# Altium PCB BopIt_PCB.PcbDoc
Units mil, origin at the board's own origin, x right, y up, seen from the top; angles counter-clockwise.
Board outline 3770 x 3775 mil, 2 copper layers (Top Layer, Bottom Layer); 24 components, 16 nets, 77 pads, 0 vias.
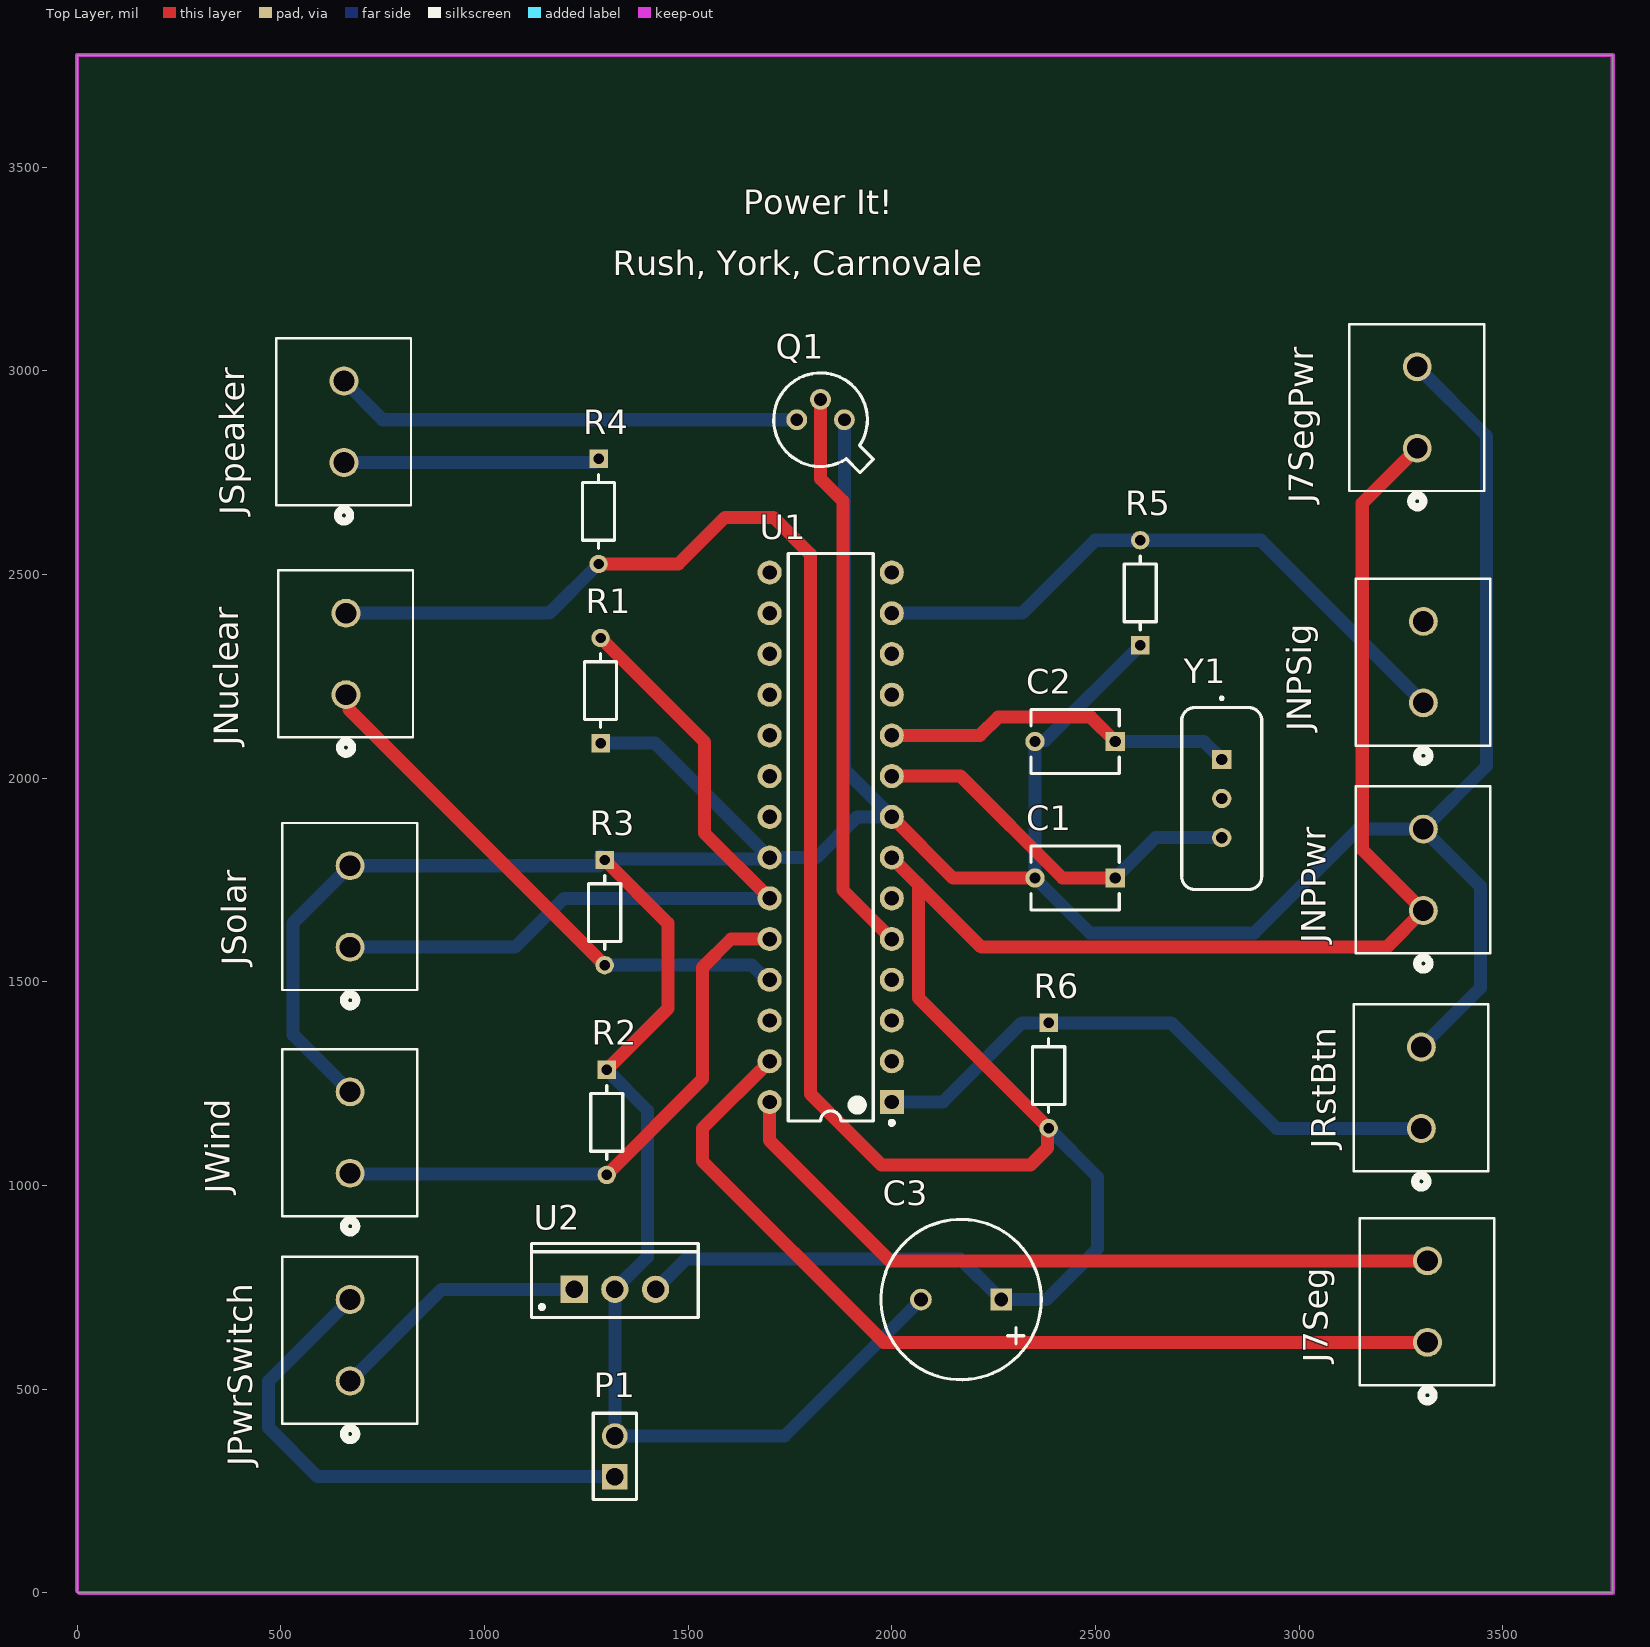
[diagram p0: Top Layer view]
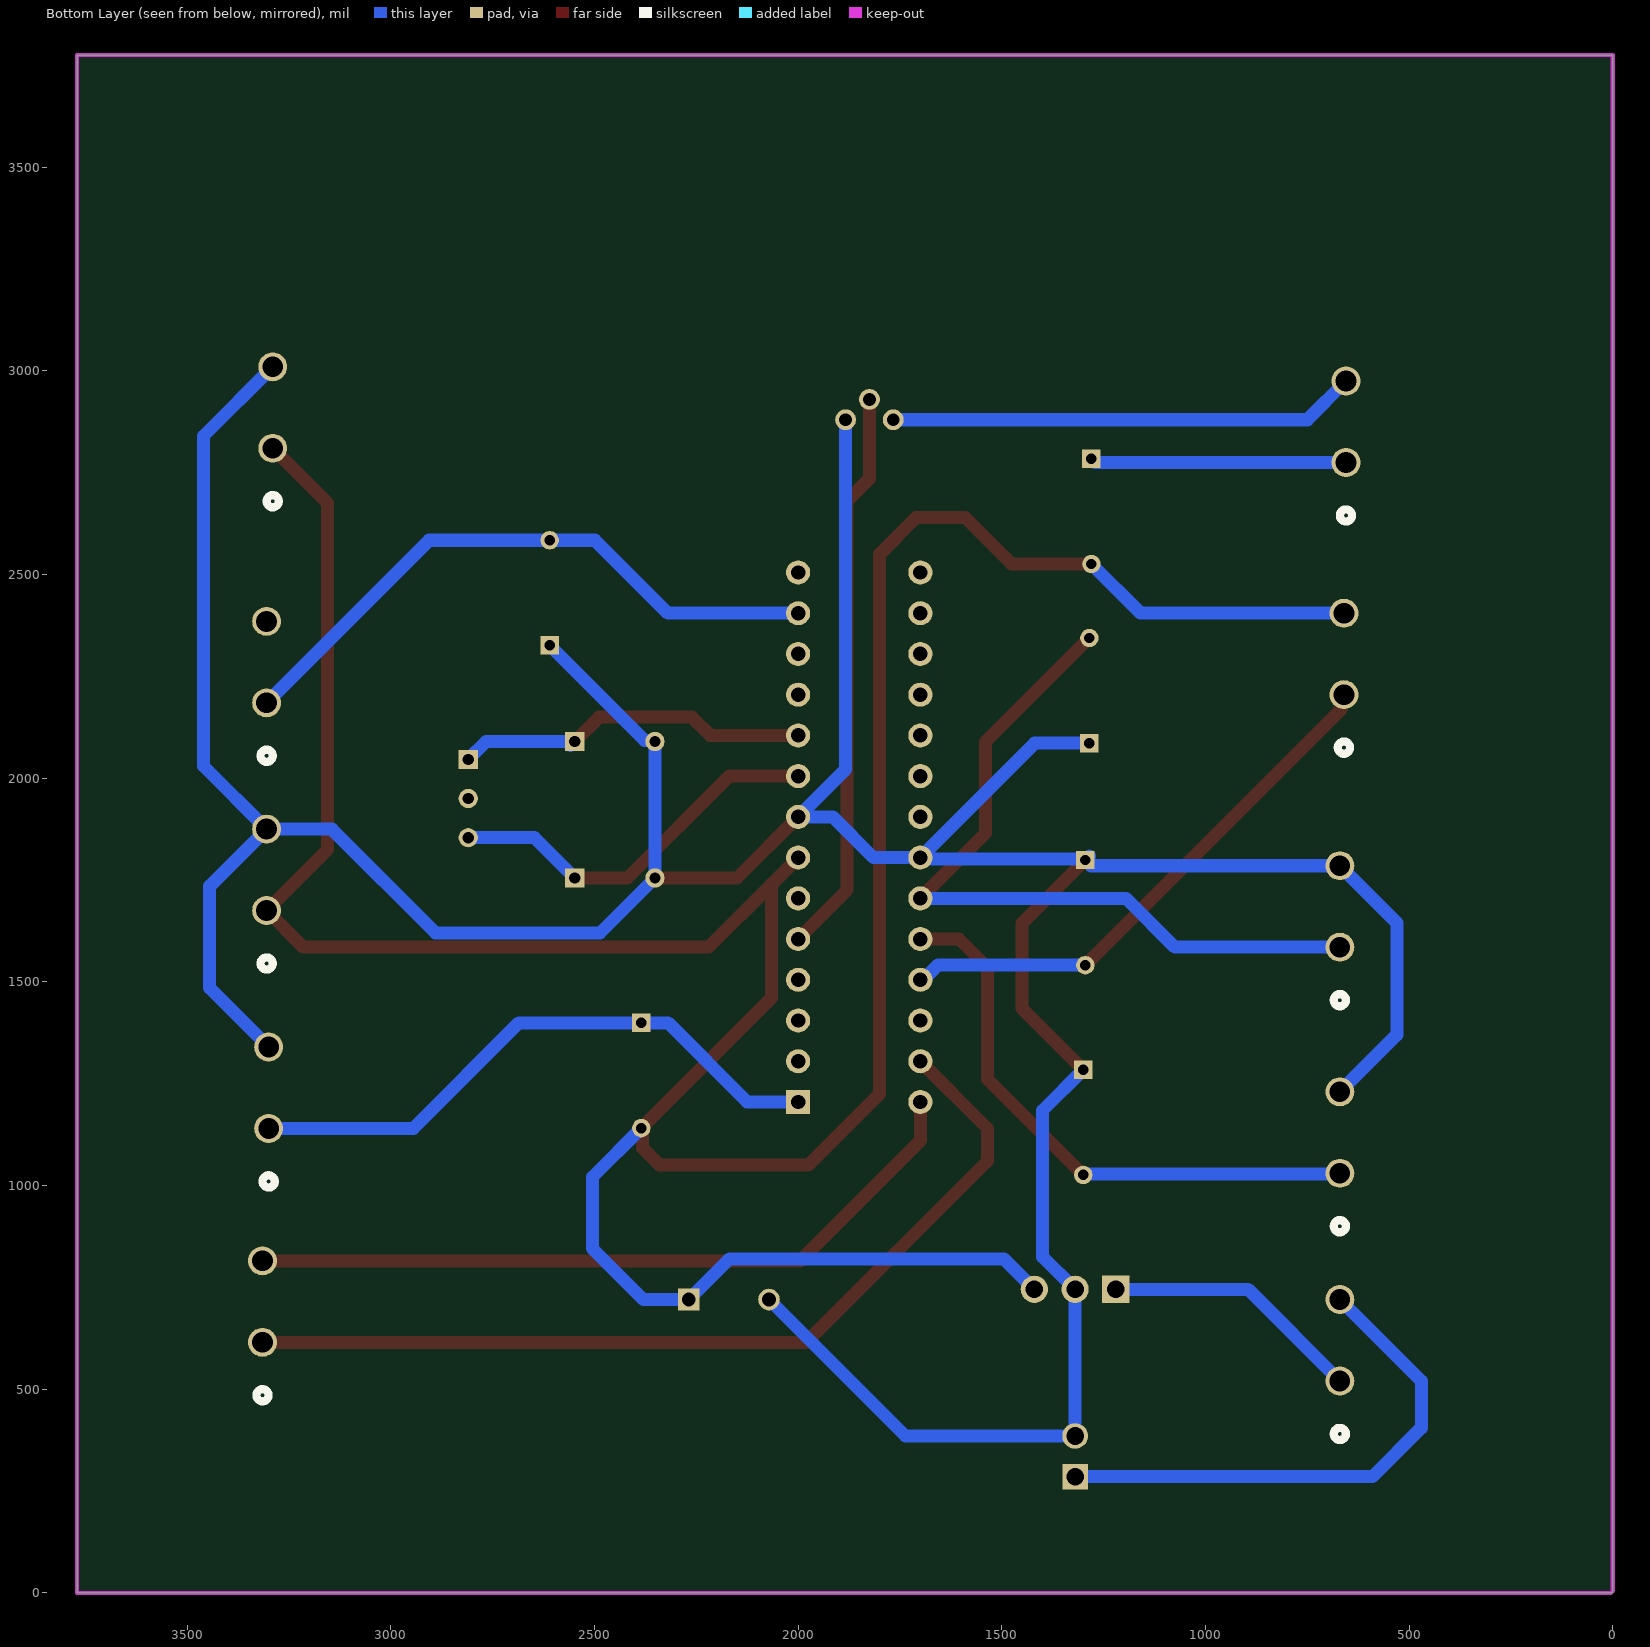
[diagram p1: Bottom Layer view, seen from below]

## Layer stack, top to bottom
Top Solder: solder mask 0.4, Solder Resist, Dk 3.5
Top Layer: signal copper 1.4
Dielectric 1: dielectric 12.6, FR-4, Dk 4.8
Bottom Layer: signal copper 1.4
Bottom Solder: solder mask 0.4, Solder Resist, Dk 3.5

## Board outline
0,0 3770,0 3770,3775 0,3775

## Design rules (kind name [scope] priority, off if disabled: settings)
BoardOutlineClearance [All] p1: gap=7.87 ignorepadtopadclearanceinfootprint=FALSE except(15.75: Arc-SplitBarrior Arc-SplitContinuation Track-SplitBarrior Track-SplitContinuation SMDPad-SplitBarrior SMDPad-SplitContinuation THPad-SplitBarrior THPad-SplitContinuation Via-SplitBarrior Via-SplitContinuation Fill-SplitBarrior Fill-SplitContinuation Poly-SplitBarrior Poly-SplitContinuation Region-SplitBarrior Region-SplitContinuation Text-SplitBarrior Text-SplitContinuation)
Clearance "Clearance Bottom Layer" [OnLayer('Bottom Layer')] p1: gap=8 ignorepadtopadclearanceinfootprint=TRUE except(10: Arc-Text Track-Text SMDPad-Text THPad-Text Via-Text Fill-Text Poly-Text Region-Text Text-Text)
Clearance "Clearance Top Layer" [OnLayer('Top Layer')] p2: gap=8 ignorepadtopadclearanceinfootprint=TRUE except(10: Arc-Text Track-Text SMDPad-Text THPad-Text Via-Text Fill-Text Poly-Text Region-Text Text-Text)
Clearance [All] p3: gap=7.87 ignorepadtopadclearanceinfootprint=FALSE except(3.5: Arc-Arc Arc-Track Arc-SMDPad Track-Track Track-SMDPad SMDPad-SMDPad; 5: Arc-Via Track-Via SMDPad-Via THPad-Via Via-Via; 10: Arc-Text Track-Text SMDPad-Text THPad-Text Via-Text Fill-Text Poly-Text Region-Text Text-Text)
HoleSize [All] p1: absolutevalues=TRUE maxlimit=248.03 minlimit=7.87 maxpercent=80.000 minpercent=20.000
MinimumAnnularRing [All] p1: minimumring=3
MinimumSolderMaskSliver [All] p1: minsoldermaskwidth=3.94
PolygonConnect PolygonConnect_1 [All] p1: thpad.connectstyle=Relief thpad.reliefconductorwidth=20 thpad.reliefentries=4 thpad.polygonreliefangle="90 Angle" thpad.airgapwidth=10 smdpad.connectstyle=Relief smdpad.reliefconductorwidth=20 smdpad.reliefentries=4 smdpad.polygonreliefangle="90 Angle" smdpad.airgapwidth=10 via.connectstyle=Direct via.reliefconductorwidth=20 via.reliefentries=4 via.polygonreliefangle="90 Angle" via.airgapwidth=10
RoutingCorners [All] p1: cornerstyle=Round minsetback=100 maxsetback=100
RoutingVias [All] p1: holewidth=19.68 width=39.37 viastyle="Through Hole" minholewidth=7.87 minwidth=17.72 maxholewidth=39.37 maxwidth=78.74
SilkToSilkClearance [All] p1: silktosilkclearance=3.94
SilkToSolderMaskClearance [IsPad] p1: minsilkscreentomaskgap=3.94 clearancetoexposedcopper=TRUE
SolderMaskExpansion [All] p1: expansion=4 istentingtop=FALSE
Width [All] p1: maxlimit=100 minlimit=3.5 preferedwidth=15
25 further rules are at their usual default settings.

## Components (designator, comment, footprint, x,y, rotation, side; value= is the part's Value field where it differs from the comment)
C1 "22p" FP-RCEWM1-MFG 2450,1755 r180 top
C2 "22p" FP-RCEWM1-MFG 2450,2090 r180 top
C3 "10u" NIC-UVR-10x12.5-2_V 2170,720 r180 top
J7Seg "1729128" CONN_1729128_PXC 3315,615 r90 top
J7SegPwr "1729128" CONN_1729128_PXC 3290,2810 r90 top
JNPPwr "1729128" CONN_1729128_PXC 3305,1675 r90 top
JNPSig "1729128" CONN_1729128_PXC 3305,2185 r90 top
JNuclear "1729128" CONN_1729128_PXC 660,2205 r90 top
JPwrSwitch "1729128" CONN_1729128_PXC 670,520 r90 top
JRstBtn "1729128" CONN_1729128_PXC 3300,1140 r90 top
JSolar "" CONN_1729128_PXC 670,1585 r90 top value=1729128
JSpeaker "1729128" CONN_1729128_PXC 655,2775 r90 top
JWind "1729128" CONN_1729128_PXC 670,1030 r90 top
P1 "61300211121" 61300211121 1320,335 r90 top
Q1 "2N2222" MLTC-TO-18-3 1825,2880 r180 top
R1 "1k" FP-CF18-MFG 1285,2215 r90 top value=2.2kΩ
R2 "1k" FP-CF18-MFG 1300,1155 r270 top value=2.2kΩ
R3 "1k" FP-CF18-MFG 1295,1670 r270 top value=2.2kΩ
R4 "10" FP-CF18-MFG 1280,2655 r270 top value=2.2kΩ
R5 "1k" FP-CF18-MFG 2610,2455 r90 top value=2.2kΩ
R6 "1k" FP-CF18-MFG 2385,1270 r270 top value=2.2kΩ
U1 "ATmega328-PU" 28P3 1850,1855 r180 top
U2 "Vreg" TO220 1320,745 r0 top
Y1 "16kHz Clk" ECS-4X-3IL 2810,1950 r270 top

## Footprints (in the part's own frame and the unit in brackets; to place one, negate y for a bottom-side part, rotate by r counter-clockwise, add the part's x,y. Pads: shape width x height; smd on the part's side, far side on the other; paste and mask are expansions set on the pad)
28P3 [mm] "28-Pin Plastic Dual In-Line Package (PDIP)"
  rect 1.5x1.5 hole 0.9: 1(-3.81,16.51)
  round 1.5 hole 0.9: 2(-3.81,13.97) 3(-3.81,11.43) 4(-3.81,8.89) 5(-3.81,6.35) 6(-3.81,3.81) 7(-3.81,1.27) 8(-3.81,-1.27) 9(-3.81,-3.81) 10(-3.81,-6.35) 11(-3.81,-8.89) 12(-3.81,-11.43) 13(-3.81,-13.97) 14(-3.81,-16.51) 15(3.81,-16.51) 16(3.81,-13.97) 17(3.81,-11.43) 18(3.81,-8.89) 19(3.81,-6.35) 20(3.81,-3.81) 21(3.81,-1.27) 22(3.81,1.27) 23(3.81,3.81) 24(3.81,6.35) 25(3.81,8.89) 26(3.81,11.43) 27(3.81,13.97) 28(3.81,16.51)
  silkscreen extent -3.94,-17.7 2.65,17.93, body extent -3.6,-17.65 3.6,17.65, height 4.58
61300211121 [mm] "Pin Header, pitch 2.54 mm, THT, Vertical, single row, 2p"
  rect 1.6x1.6 hole 1.1: 1(-1.27,0)
  round 1.6 hole 1.1: 2(1.27,0)
  silkscreen extent -2.69,-1.35 2.69,1.35, body extent -2.54,-1.27 2.54,1.27, height 8.57
CONN_1729128_PXC [mil]
  round 71 hole 51 mask-1000: 1(0,0) 2(200,0)
  silkscreen extent -145,-164 305,166
ECS-4X-3IL [mm]
  rect 1.2x1.2 hole 0.7: 1(-2.44,0)
  round 1.2 hole 0.7: 2(0,0) 3(2.44,0)
  silkscreen extent -6.34,-2.5 5.68,2.5, body extent -5.68,-2.5 5.68,2.5, height 3.5
FP-CF18-MFG [mm]
  rect 1.15x1.15 hole 0.65 paste-1000 mask+0: 1(-3.28,0)
  round 1.15 hole 0.65 paste-1000 mask+0: 2(3.28,0)
  silkscreen extent -2.3,-1 2.3,1
FP-RCEWM1-MFG [mm]
  rect 1.2x1.2 hole 0.7 paste-1000 mask+0: 1(-2.5,0)
  round 1.2 hole 0.7 paste-1000 mask+0: 2(2.5,0)
  silkscreen extent -2.75,-2 2.75,2, body extent -3.2,-2.1 3.2,2.1, height 0.25
MLTC-TO-18-3 [mm] "TO-18, 3-Leads"
  round 1.3 hole 0.8: 1(-1.485,0) 2(0,-1.27) 3(1.485,0)
  silkscreen extent -3.29,-2.92 2.92,3.29, body extent -3.29,-2.93 2.93,3.29, height 5.33
NIC-UVR-10x12.5-2_V [mm] "TH, 2-Leads, Dia 10mm, Body Length 14mm, Pitch 5mm"
  rect 1.35x1.35 hole 0.85: 1(-2.5,0)
  round 1.35 hole 0.85: 2(2.5,0)
  silkscreen extent -5,-5 5,5, body extent -5,-5 5,5, height 14
TO220 [mm] "TO, Thru-Hole, Vertical, Heatsink Mounted; 3 In-Line Leads; Pitch 2.54 mm"
  rect 1.7x1.7 hole 1.1: 1(-2.54,0)
  round 1.7 hole 1.1: 2(0,0) 3(2.54,0)
  silkscreen extent -5.2,-1.75 5.2,2.85, body extent -5.25,-1.8 5.25,2.9, height 19.7

## Part data
C1 C2: library part CMP-06035-054690-1, "Cap Ceramic 10uF 50V X7R ±20% Radial 5mm +125°C Automotive Ammo Pack", Capacitance=10uF, Case/Package=Radial, Dielectric=X7R, Max Operating Temperature=125°C, Min Operating Temperature=-55°C, Package Quantity=1500, Ratings=AEC-Q200, Resistor Type=Ceramic, Tolerance=20%, Voltage=50V, Depth=7.5mm, Diameter=5.5mm, Height=7.5mm, Height - Seated (Max)=0.295inch, Lead Diameter=0.5mm, Lead Pitch=0.197inch, Lead/Base Style="Formed Leads", Length=5.5mm, Mount="Through Hole", Packaging="Tape and Reel", Termination=Radial, Voltage Rating=50V, Voltage Rating (DC)=50V, Width=0.157inch
C3: library part CMP-1217-00001-1, "Aluminum Electrolytic Capacitor, 63 V, -40 to 85 degC, 2-Pin CAP, RoHS", Capacitance Tolerance=+/-20%, Manufacturer=Nichicon, Operating Temperature="-40 to 85 degC", PartNumber=UVR1J101MPD1TD, Rated Capacitance="100 uF", Rated Voltage="63 V", ComponentLink1Description="Manufacturer URL", ComponentLink1URL=http://www.nichicon.co.jp/, ComponentLink2Description=Datasheet, ComponentLink2URL=http://nichicon-us.com/english/products/pdfs/e-vr.pdf, ComponentLink3Description="Package Specification", ComponentLink3URL=http://nichicon-us.com/english/products/pdfs/e-vr.pdf, DatasheetVersion=Sep-13, Mounting Technology="Through Hole", PackageDescription="2-Pin Through Hole Package, Dia 10 mm, Body Length 12.5 mm, Pitch 5 mm", Packing=Bulk, Rated Ripple@85 degC 120 Hz="300 mA", RoHS=TRUE
J7Seg J7SegPwr JNPPwr JNPSig JNuclear JPwrSwitch JRstBtn JSpeaker JWind: Mfr_Name="Phoenix Contact", C="Copyright (C) 2018 Accelerated Designs. All rights reserved", Copyright="Copyright (C) 2022 Ultra Librarian. All rights reserved.", Digi-Key_Part_Number_1=277-1247-ND, Manufacturer_Part_Number=1729128
JSolar: library part 1729128, Mfr_Name="Phoenix Contact", C="Copyright (C) 2018 Accelerated Designs. All rights reserved", Copyright="Copyright (C) 2022 Ultra Librarian. All rights reserved.", Digi-Key_Part_Number_1=277-1247-ND, Manufacturer_Part_Number=1729128
P1: library part CMP-1712-00002-4, "THT Vertical Pin Header WR-PHD, Pitch 2.54 mm, Single Row, 2 pins", Contact Resistance=20mOhm, Manufacturer="Wurth Elektronik", Operating Temperature=-40to105degC, Rated Current=3A, Withstanding Voltage=500VAC, Working Voltage=250VAC, Datasheet URL=https://katalog.we-online.de/em/datasheet/6130xx11121.pdf, Gender=Male, Manufacturer URL=http://www.we-online.de, Mounting Technology=THT, Orientation=Vertical, Package Reference=61300211121, Packaging=Bag, Part Number=61300211121, Pin Number=2, Pitch=2.54mm, Publisher=WurthElektronik, Row Number=Single
Q1: library part CMP-2000-05237-1, "Low Power Bipolar NPN Transistor, 30 V, -65 to 200 degC, 3-Pin TO-18, RoHS, Bulk", Collector Emitter Voltage V(br)ceo=30V, Collector Emitter Voltage Vces=400mV, Continuous Collector Current Ic Max=800mA, Current Ic @ Vce Sat=150mA, DC Current Gain hFE=100, Full Power Rating Temperature=25degC, Manufacturer=Multicomp, Package / Case=TO-18, Package Description="3-Pin Transistor Outline Package (TO-18), Dia 5.54 mm, Pitch Pitch 1.485mm", Package Reference=TO-18-3, Power Dissipation Pd=500mW, Voltage Vcbo=60V, Current Ic Continuous a Max=800mA, Current Ic hFE=150mA, Datasheet URL=http://www.farnell.com/datasheets/1662272.pdf, Datasheet Version="Rev. 1.1, 05/2012", DC Collector Current=800mA, Gain Bandwidth ft Min=250MHz, Gain Bandwidth ft Typ=250MHz, Hfe Min=100, Manufacturer URL=http://uk.farnell.com/b/multicomp, No. of Pins=3, No. of Transistors=1, Pin Configuration=a, Power Dissipation Ptot Max=500mW, SVHC=NoSVHC(19-Dec-2012), Transistor Case Style=TO-18, Transistor Polarity=NPN
R1 R2 R3 R4 R5 R6: library part CMP-26528-000001-1, "RES 2.2K OHM 1/8W 5% CF AXIAL", Manufacturer="Stackpole Electronics Inc", Manufacturer Part Number=CF18JT2K20, Package=CF18, Power Rating=0.125W, Resistance=2.2kΩ, Temperature="-55°C to +155°C", Temperature Coefficient=0/-400ppm/°C, Temperature Range High=+155°C, Temperature Range Low=-55°C, Tolerance=5%, Voltage Rating=250V, Automotive=No, Category=Res, ComponentLink2Description=Datasheet, ComponentLink2URL=https://www.seielect.com/catalog/sei-cf_cfm.pdf, Composition="Carbon Film", Device Class L1="Passive Components", Device Class L2=Resistors, Device Class L3="Through-Hole Resistors", Digikey Description="RES 2.2K OHM 1/8W 5% CF AXIAL", Height=2mm, Ipc Land Pattern Name=RESAD656W65L360D200, Lead Free=Yes, Octopart=https://octopart.com/cf18jt2k20-stackpole+electronics-19205714, RoHS=TRUE, Series=CF
U1: library part CMP-0095-00015-2, "8-bit AVR Microcontroller, 32KB Flash, 1KB EEPROM, 2KB SRAM, 28-pin PDIP, Industrial Grade (-40°C to 85°C)", ComponentLink1Description="Manufacturer URL", ComponentLink1URL=http://www.atmel.com/, ComponentLink2Description="ATmega48A/48PA/88A/88PA/168A/168PA/328/328P Datasheet", ComponentLink2URL=http://www.atmel.com/dyn/resources/prod_documents/8271.pdf, ComponentLink3Description="ATmega48A/48PA/88A/88PA/168A/168PA/328/328P Summary", ComponentLink3URL=http://www.atmel.com/dyn/resources/prod_documents/8271S.pdf, DatasheetVersion="revD, May-2011", PackageDescription="28-lead (0.300\"/7.62mm Wide) Plastic Dual Inline Package (PDIP)", PackageReference=28P3, PackageVersion="revB, Sep-2001", RevisionNote="DatasheetVersion updated. URLs added."
U2: library part CMP-0244-00483-1, "Positive Voltage Regulator, 5V, 3-Pin TO-220", ComponentLink1Description="Manufacturer URL", ComponentLink1URL=http://www.st.com, ComponentLink2Description=Datasheet, ComponentLink2URL=http://www.st.com/internet/com/TECHNICAL_RESOURCES/TECHNICAL_LITERATURE/DATASHEET/CD00000444.pdf, ComponentLink3Description="Package Specification", ComponentLink3URL=http://www.st.com/internet/com/TECHNICAL_RESOURCES/TECHNICAL_LITERATURE/PACKAGE_INFORMATION/CD00004649.pdf, DatasheetVersion=16/11/2011, PackageDescription="TO, Thru-Hole, Vertical, Heatsink Mounted; 3 In-Line Leads; Pitch 2.54 mm", PackageReference=TO220, PackageVersion=ver3.0
Y1: library part CMP-1669-00001-2, "CRYSTAL 20.000MHZ 20PF 49US", Manufacturer=ECS, PartNumber=ECS-200-20-4X, ComponentLink1Description=Datasheet, ComponentLink1URL=http://www.ecsxtal.com/store/pdf/hc-49usx.pdf, PackageReference=4X-3IL

## Nets (pads, with @x,y where several pads share a name; then routed paths per layer and width w, separated by ;. In a path a pad name is that pad's centre, name@x,y a point inside that pad or via, vN(x,y) a via of type N, cw(c..) or ccw(c..) an arc to the next point about the centre after c; other vN are vias at no path point)
GND: C1.2 C2.2 C3.2 J7SegPwr.2 JNPPwr.2 JRstBtn.2 JSolar.2 JWind.2 P1.2 Q1.1 R1.1 R2.1 R3.1 R5.1 U1.8 U1.22 U2.2 | length 10271.4
  Top Layer w32: R3.1 1450,1644.13 1450,1434.13 R2.1 ; U1.8 2150,1755 C1.2 ; C2.2@2351.57,2085.87 C2.2
  Bottom Layer w32: JWind.2 530,1370 530,1645 JSolar.2 1280.87,1785 R3.1 ; R3.1@1285,1809.13 R3.1 ; R1.1 1419.13,2085.87 U1.22 ; R2.1 1400,1184.13 1400,825 U2.2 P1.2 1736.57,385 C3.2 ; Q1.1 1883.46,2021.54 U1.8 1915,1905 1815,1805 U1.22 ; R5.1 2377.05,2092.92 2354.49,2092.92 C2.2 C1.2 2486.57,1620 2890,1620 3145,1875 JNPPwr.2 ; J7SegPwr.2 3460,2840 3460,2030 JNPPwr.2 ; JRstBtn.2 3445,1485 3445,1735 JNPPwr.2 ; R3.1 1297.93,1802.07 1697.07,1802.07 U1.22
NetC1_1: C1.1 U1.9 Y1.3 | length 954.5
  Top Layer w32: U1.9 2168.92,2005 2418.92,1755 C1.1
  Bottom Layer w32: C1.1 2647.36,1853.94 Y1.3
NetC2_1: C2.1 U1.10 Y1.1 | length 885.8
  Top Layer w32: U1.10 2216.16,2105 2261.16,2150 2488.43,2150 C2.1
  Bottom Layer w32: C2.1@2558.43,2080 C2.1 2766.06,2090 Y1.1
NetC3_1: C3.1 J7SegPwr.1 JNPPwr.1 JNuclear.2 R4.2 R6.2 U1.7 U2.3 | length 8301.7
  Top Layer w32: R4.2 1475.87,2525.87 1590,2640 1710,2640 1800,2550 1800,1225 1975,1050 2340,1050 2382.46,1092.46 2382.46,1138.33 R6.2 2065,1460.87 2065,1740 ; U1.7@1995,1800 U1.7 2065,1740 ; J7SegPwr.1 3155,2675 3155,1825 JNPPwr.1 3215,1585 2220,1585 2065,1740
  Bottom Layer w32: JNuclear.2 1159.13,2405 R4.2 ; U2.3 1495,820 2168.43,820 C3.1 2380,720 2505,845 2505,1020.87 R6.2
NetJ7Seg_1: J7Seg.1 U1.27 | length 2277.7
  Top Layer w32: U1.27 1535,1140 1535,1060 1980,615 J7Seg.1
NetJ7Seg_2: J7Seg.2 U1.28 | length 1832.2
  Top Layer w32: U1.28 1700,1110 1995,815 J7Seg.2
NetJNPSig_1: JNPSig.1 R5.2 U1.13 | length 1551.6
  Bottom Layer w32: U1.13 2320,2405 2499.13,2584.13 R5.2 2905.87,2584.13 JNPSig.1 JNPSig.1@3310,2190
NetJNuclear_1: JNuclear.1 R3.2 U1.25 | length 1347
  Top Layer w32: JNuclear.1 667.46,2197.54 667.46,2168.4 R3.2
  Bottom Layer w32: R3.2 1656.81,1540.87 1692.68,1505 U1.25
NetJPwrSwitch_1: JPwrSwitch.1 U2.1 | length 650.3
  Bottom Layer w32: JPwrSwitch.1@675,515 JPwrSwitch.1 895,745 U2.1
NetJPwrSwitch_2: JPwrSwitch.2 P1.1 | length 1297.5
  Bottom Layer w32: JPwrSwitch.2 470,520 470,405 590,285 P1.1
NetJRstBtn_1: JRstBtn.1 R6.1 U1.1 | length 1487.7
  Bottom Layer w32: U1.1 2125,1205 2319.13,1399.13 R6.1 2685.87,1399.13 2945,1140 JRstBtn.1
NetJSolar_1: JSolar.1 R1.2 U1.23 | length 1890.7
  Top Layer w32: R1.2 1540,2089.13 1540,1865 U1.23
  Bottom Layer w32: JSolar.1 1075,1585 1195,1705 U1.23
NetJSpeaker_1: JSpeaker.1 R4.1 | length 628.8
  Bottom Layer w32: JSpeaker.1 1270.87,2775 R4.1
NetJSpeaker_2: JSpeaker.2 Q1.3 | length 1150.9
  Bottom Layer w32: JSpeaker.2 750,2880 Q1.3
NetJWind_1: JWind.1 R2.2 U1.24 | length 1432.2
  Top Layer w32: R2.2 1535,1260.87 1535,1535 1605,1605 U1.24
  Bottom Layer w32: JWind.1 672.07,1027.93 1297.93,1027.93 R2.2
NetQ1_2: Q1.2 U1.5 | length 1397.5
  Top Layer w32: Q1.2 1825,2735 1880,2680 1880,1725 U1.5
pads on no net: JNPSig.2 U1.2 U1.3 U1.4 U1.6 U1.11 U1.12 U1.14 U1.15 U1.16 U1.17 U1.18 U1.19 U1.20 U1.21 U1.26 Y1.2

## Keep-outs
Keep-Out Layer:
  lines w10: 0,5 0,3775 3770,3775 3770,0 5,0

## Silkscreen, mask and mechanical layers (free items; w line width, h text height)
Top Overlay:
  text "Power It!" at 1635,3385 h60
  text "Rush, York, Carnovale" at 1315,3234.99 h60

## Text inside footprints (layer, text, board x,y; h text height)
J7Seg: Top Component Center "0.2in/5.08mm" at 3048.58,715 h15.62 r90; Top Component Center "0.4in/10.16mm" at 2723.58,715 h15.62 r90; Top Component Center "0in/0mm" at 3315,1035 h15.62 r90; Top Component Center "0.161in/4.1mm" at 3234.29,135 h15.62 r90; Top Component Center "0.321in/8.15mm" at 3314.02,185 h15.62 r90
J7SegPwr: Top Component Center "0.2in/5.08mm" at 3023.58,2910 h15.62 r90; Top Component Center "0.4in/10.16mm" at 2698.58,2910 h15.62 r90; Top Component Center "0in/0mm" at 3290,3230 h15.62 r90; Top Component Center "0.161in/4.1mm" at 3209.29,2330 h15.62 r90; Top Component Center "0.321in/8.15mm" at 3289.02,2380 h15.62 r90
JNPPwr: Top Component Center "0.2in/5.08mm" at 3038.58,1775 h15.62 r90; Top Component Center "0.4in/10.16mm" at 2713.58,1775 h15.62 r90; Top Component Center "0in/0mm" at 3305,2095 h15.62 r90; Top Component Center "0.161in/4.1mm" at 3224.29,1195 h15.62 r90; Top Component Center "0.321in/8.15mm" at 3304.02,1245 h15.62 r90
JNPSig: Top Component Center "0.2in/5.08mm" at 3038.58,2285 h15.62 r90; Top Component Center "0.4in/10.16mm" at 2713.58,2285 h15.62 r90; Top Component Center "0in/0mm" at 3305,2605 h15.62 r90; Top Component Center "0.161in/4.1mm" at 3224.29,1705 h15.62 r90; Top Component Center "0.321in/8.15mm" at 3304.02,1755 h15.62 r90
JNuclear: Top Component Center "0.2in/5.08mm" at 393.58,2305 h15.62 r90; Top Component Center "0.4in/10.16mm" at 68.58,2305 h15.62 r90; Top Component Center "0in/0mm" at 660,2625 h15.62 r90; Top Component Center "0.161in/4.1mm" at 579.29,1725 h15.62 r90
JRstBtn: Top Component Center "0.2in/5.08mm" at 3033.58,1240 h15.62 r90; Top Component Center "0.4in/10.16mm" at 2708.58,1240 h15.62 r90; Top Component Center "0in/0mm" at 3300,1560 h15.62 r90; Top Component Center "0.161in/4.1mm" at 3219.29,660 h15.62 r90
JSolar: Top Component Center "0.2in/5.08mm" at 403.58,1685 h15.62 r90; Top Component Center "0.4in/10.16mm" at 78.58,1685 h15.62 r90; Top Component Center "0in/0mm" at 670,2005 h15.62 r90; Top Component Center "0.161in/4.1mm" at 589.29,1105 h15.62 r90; Top Component Center "0.321in/8.15mm" at 669.02,1155 h15.62 r90
JSpeaker: Top Component Center "0.2in/5.08mm" at 388.58,2875 h15.62 r90; Top Component Center "0.4in/10.16mm" at 63.58,2875 h15.62 r90; Top Component Center "0in/0mm" at 655,3195 h15.62 r90; Top Component Center "0.161in/4.1mm" at 574.29,2295 h15.62 r90; Top Component Center "0.321in/8.15mm" at 654.02,2345 h15.62 r90
JWind: Top Component Center "0.2in/5.08mm" at 403.58,1130 h15.62 r90; Top Component Center "0.4in/10.16mm" at 78.58,1130 h15.62 r90; Top Component Center "0in/0mm" at 670,1450 h15.62 r90; Top Component Center "0.161in/4.1mm" at 589.29,550 h15.62 r90; Top Component Center "0.321in/8.15mm" at 669.02,600 h15.62 r90